# Altium PCB PCB.PcbDoc
Units mil, origin at the board's own origin, x right, y up, seen from the top; angles counter-clockwise.
Board outline 2362.2 x 2362.2 mil, 2 copper layers (Top Layer, Bottom Layer); 29 components, 22 nets, 113 pads, 20 vias.
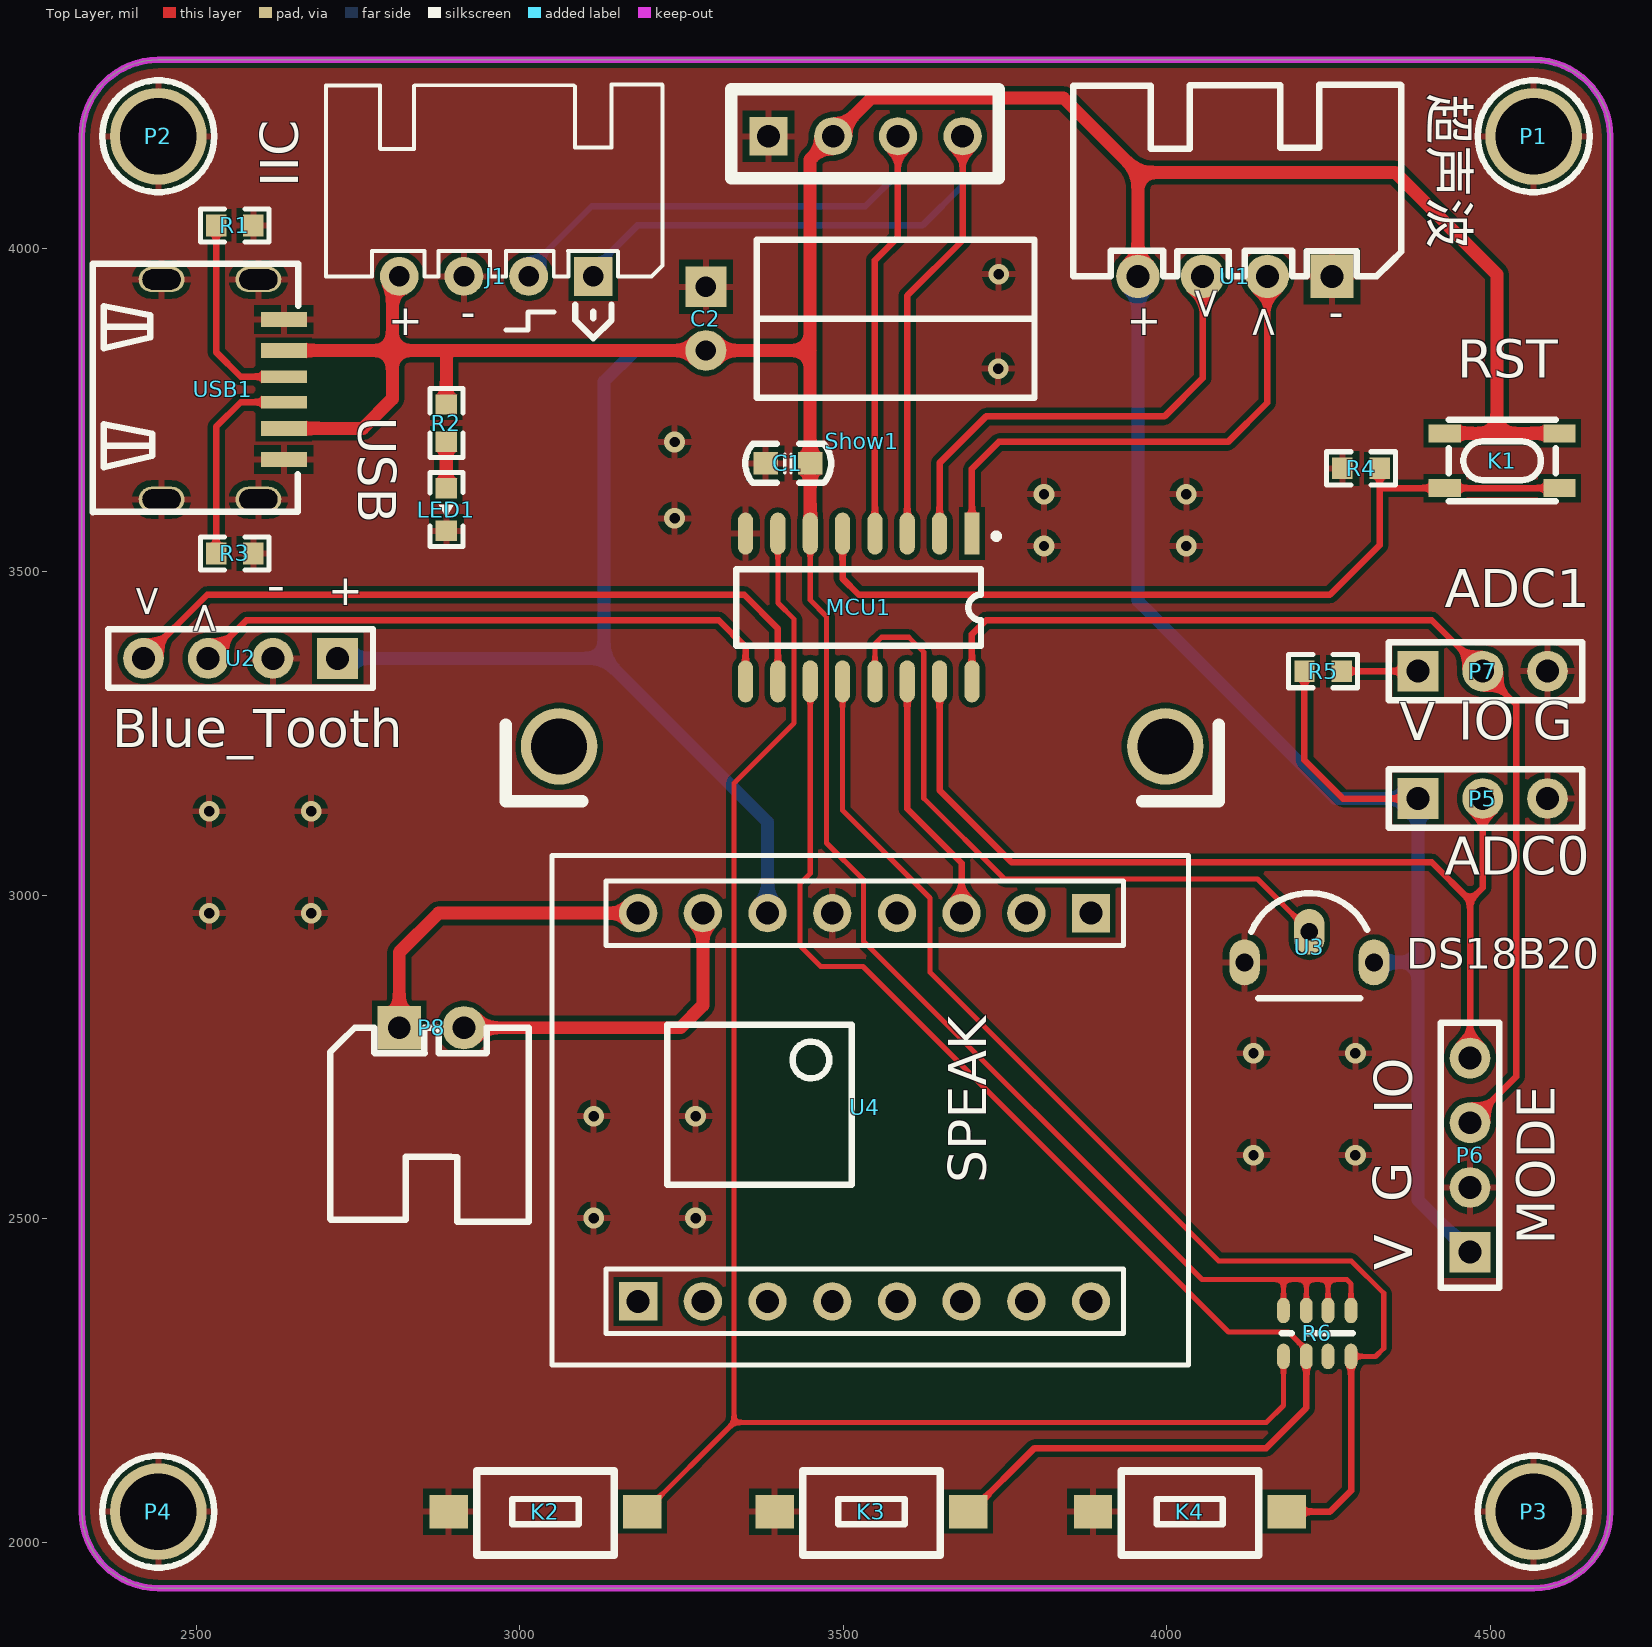
[diagram p0: Top Layer view]
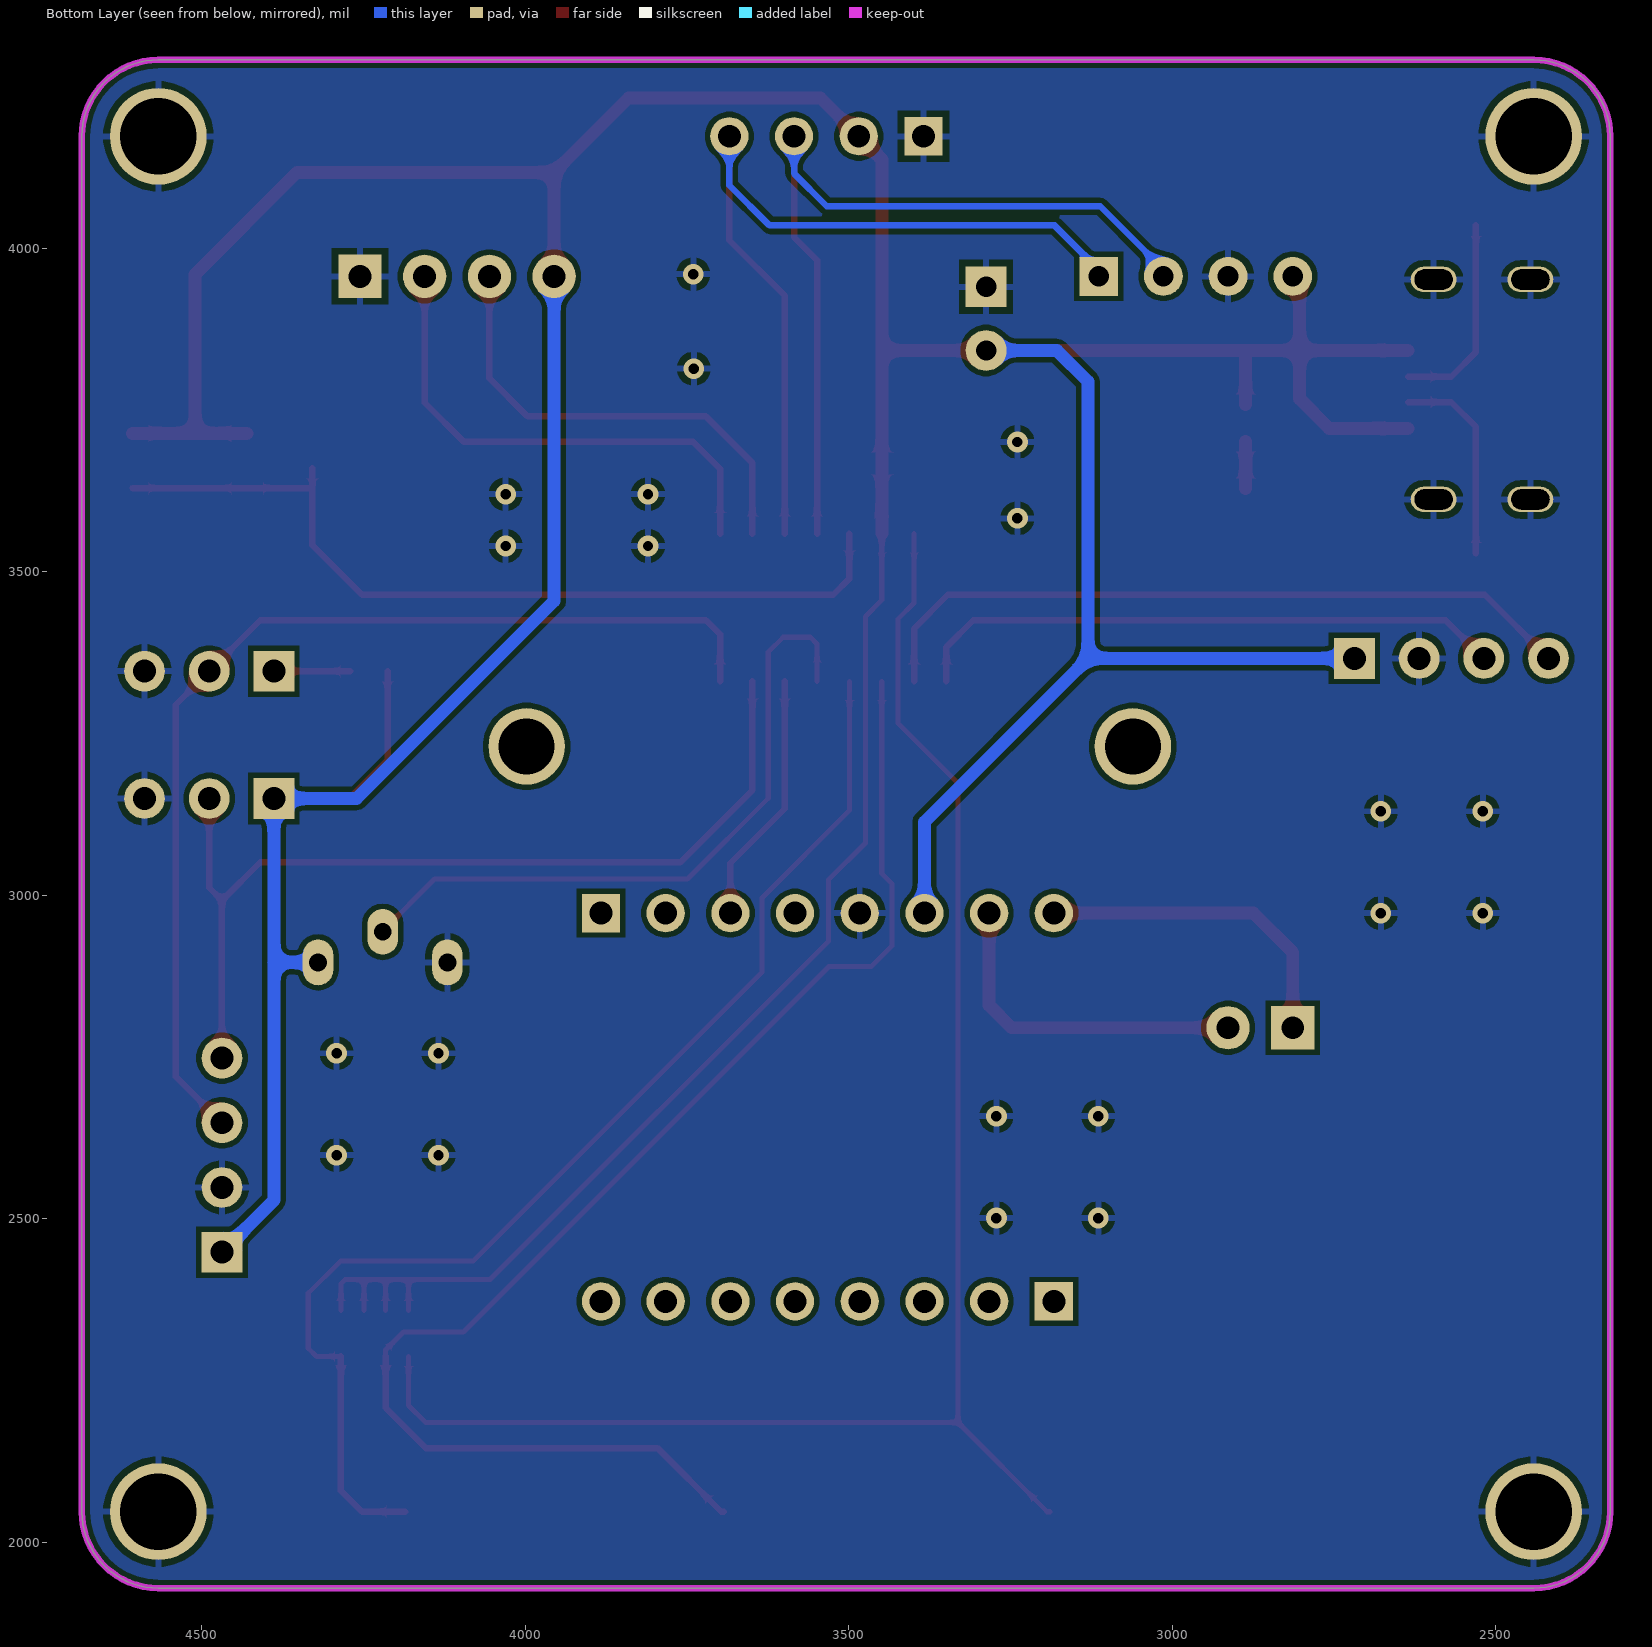
[diagram p1: Bottom Layer view, seen from below]

## Layer stack, top to bottom
Top Solder: solder mask 0.4, Solder Resist, Dk 3.5
Top Layer: signal copper 1.4
Dielectric 1: dielectric 12.6, FR-4, Dk 4.8
Bottom Layer: signal copper 1.4
Bottom Solder: solder mask 0.4, Solder Resist, Dk 3.5

## Board outline
2322.83,2047.24 2322.83,4173.23 cw(c2440.94,4173.23) 2440.94,4291.34 4566.93,4291.34 cw(c4566.93,4173.23) 4685.04,4173.23 4685.04,2047.24 cw(c4566.93,2047.24) 4566.93,1929.13 2440.94,1929.13 cw(c2440.94,2047.24)

## Design rules (kind name [scope] priority, off if disabled: settings)
Clearance [All] p1: gap=8 ignorepadtopadclearanceinfootprint=TRUE
HoleSize [All] p1: absolutevalues=TRUE maxlimit=400 minlimit=1 maxpercent=80.000 minpercent=20.000
HoleToHoleClearance [All] p1: gap=8 allowstackedmicrovias=TRUE
MinimumSolderMaskSliver [All] p1: minsoldermaskwidth=4
PolygonConnect [All] p1: connectstyle=Relief reliefconductorwidth=10 reliefentries=4 polygonreliefangle="90 Angle" airgapwidth=10
RoutingVias [All] p1: holewidth=28 width=50 viastyle="Through Hole" minholewidth=12 minwidth=24 maxholewidth=28 maxwidth=50
SilkToSilkClearance [All] p1: silktosilkclearance=0
SilkToSolderMaskClearance [IsPad] p1: minsilkscreentomaskgap=0 clearancetoexposedcopper=TRUE
SolderMaskExpansion [All] p1: expansion=4 istentingtop=FALSE
Width [All] p1: maxlimit=50 minlimit=8 preferedwidth=10
25 further rules are at their usual default settings.

## Components (designator, comment, footprint, x,y, rotation, side; value= is the part's Value field where it differs from the comment)
C1 "100NF" CAP_0603 3379.62,3667.62 r0 top
C2 "220UF" CAP_PR_2.5_6.3_RA 3287.4,3891.34 r270 top
J1 "IIC" IIC-XH2.54-4PIN 3113.39,3956.69 r180 top
K1 "KEY" KEY_SMD 4606.78,3629.41 r180 top
K2 "KEY" SW_PB_3X6 3039.37,2047.24 r180 top
K3 "KEY" SW_PB_3X6 3543.31,2047.24 r180 top
K4 "KEY" SW_PB_3X6 4035.43,2047.24 r180 top
LED1 "LED_R/G/B/Y" LED_0603_R 2886.22,3596.19 r90 top
MCU1 "STC15W408AS-16P" SOIC_16 3523.62,3444.88 r180 top
P1 "铜柱6m" M3x6_L-Type 4566.93,4173.23 r0 top
P2 "铜柱6m" M3x6_L-Type 2440.94,4173.23 r0 top
P3 "铜柱6m" M3x6_L-Type 4566.93,2047.24 r0 top
P4 "铜柱6m" M3x6_L-Type 2440.94,2047.24 r0 top
P5 "Header 3" "Header 2.54X3" 4488.19,3149.61 r0 top
P6 "Header 4" "Header F 2.54X4" 4468.5,2598.43 r90 top
P7 "Header 3" "Header 2.54X3" 4488.19,3346.46 r0 top
P8 "OUT" XH2.54-WI-2P 2863.39,2795.28 r0 top
R1 "5.1K" RESC_0603_2 2559.06,4035.43 r0 top
R2 "1K" RESC_0603_2 2886.22,3729.98 r270 top
R3 "5.1K" RESC_0603_2 2559.06,3528.35 r0 top
R4 "10K" RESC_0603_2 4300,3660 r180 top
R5 "XK" RESC_0603_2 4241.34,3346.46 r0 top
R6 "10K" RESC_0603_4 4232.28,2322.83 r0 top
Show1 "OLED_I2C" OLED_I2C 3505.67,3666.12 r270 top
U1 "HC-SR04" Ultrasonic 4255.12,3956.69 r180 top
U2 "Blue_Tooth 2.0/5.0" uart-Haerd 2718.11,3366.14 r0 top
U3 "DS18B20" TO_92B 4220,2920 r0 top
U4 "JQ8900" SpkMo 3680.68,2675.44 r270 top
USB1 "Type_c" USB-Type-c_6P 2539.37,3779.53 r270 top

## Footprints (in the part's own frame and the unit in brackets; to place one, negate y for a bottom-side part, rotate by r counter-clockwise, add the part's x,y. Pads: shape width x height; smd on the part's side, far side on the other; paste and mask are expansions set on the pad)
CAP_0603 [mil]
  rect 38x35 smd: 1(0,0) 2(69,0)
  silkscreen extent -31,-30 101,30, body extent 4,-16 67,16, height 12
CAP_PR_2.5_6.3_RA [mm] "6.3X11"
  rect 1.6x1.6 hole 0.8: 1(-1.25,0)
  round 1.6 hole 0.8: 2(1.25,0)
  silkscreen extent -3.1,2 3.1,12.9, body extent -3.18,-0.3 3.18,13.02, height 6.38
"Header 2.54X3" [mm]
  rect 1.6x1.6 hole 0.9: 1(-2.54,0)
  round 1.6 hole 0.9: 2(0,0) 3(2.54,0)
  silkscreen extent -3.68,-1.14 3.9,1.14, body extent -3.68,-1.23 3.94,1.27, height 8.3
"Header F 2.54X4" [mm]
  rect 1.6x1.6 hole 0.9: 1(-3.81,0)
  round 1.6 hole 0.9: 2(-1.27,0) 3(1.27,0) 4(3.81,0)
  silkscreen extent -5.2,-1.14 5.19,1.14, body extent -5.21,-1.25 5.21,1.25, height 8.6
IIC-XH2.54-4PIN [mil] "-XH2.54-4PIN-"
  rect 60x60 hole 32: 1(0,0)
  round 60 hole 32: 2(100,0) 3(200,0) 4(300,0)
  silkscreen extent -107,-296 413,96, body extent -105,-300 415,11, height 236
KEY_SMD [mm] "3*4*2.5MM"
  rect 1.27x0.7 smd: 1(0,0) 1(4.5,0) 2(0,-2.15) 2(4.5,-2.15)
  silkscreen extent 0.15,-2.68 4.35,0.52, body extent 0.15,-2.68 4.35,0.52, height 4
LED_0603_R [mm]
  rect 0.8x0.85 smd: 1(-0.832,0) 2(0.832,0)
  silkscreen extent -1.45,-0.65 1.45,0.65, body extent -0.81,-0.4 0.81,0.4, height 0.6
M3x6_L-Type [mm] "M3铜柱，长：6mm"
  round 3.8 hole 3: 1(0,0)
  silkscreen extent -2.2,-2.2 2.2,2.2, body extent -2.7,-2.35 2.7,2.35, height 8.55
OLED_I2C [mm]
  round 3 hole 2.2: 0(11.072,12.493) 0(11.072,-11.307)
  rect 1.5x1.5 hole 0.9: 1(-12.881,-3.084)
  round 1.5 hole 0.9: 2(-12.881,-0.544) 3(-12.881,1.996) 4(-12.881,4.536)
  silkscreen extent -14.73,-13.41 13.22,14.59, body extent -15.04,-12.62 12.82,14.08, height 13.47
RESC_0603_2 [mm]
  rect 0.8x0.85 smd: 1(-0.73,0) 2(0.73,0)
  silkscreen extent -1.35,-0.65 1.35,0.65, body extent -0.8,-0.4 0.8,0.4, height 0.38
RESC_0603_4 [mm]
  oval 0.5x1 smd: 1(-1.327,-0.9) 2(-1.327,0.9) 3(-0.425,-0.9) 4(-0.425,0.9) 5(0.425,-0.9) 6(0.425,0.9) 7(1.327,-0.9) 8(1.327,0.9)
  silkscreen extent -1.4,0 1.4,0, body extent -1.6,-0.8 1.6,0.8, height 0.5
SOIC_16 [mm]
  rect 0.6x1.65 smd: 1(-4.445,-2.9)
  oval 0.6x1.65 smd: 2(-3.175,-2.9) 3(-1.905,-2.9) 4(-0.635,-2.9) 5(0.635,-2.9) 6(1.905,-2.9) 7(3.175,-2.9) 8(4.445,-2.9) 9(4.445,2.9) 10(3.175,2.9) 11(1.905,2.9) 12(0.635,2.9) 13(-0.635,2.9) 14(-1.905,2.9) 15(-3.175,2.9) 16(-4.445,2.9)
  silkscreen extent -5.5,-2.9 4.8,1.5, body extent -5.15,-3.03 5.15,3.03, height 1.95
SpkMo [mm]
  rect 1.5x1.5 hole 0.9: 1(-7.544,5.131) 9(7.696,-12.649)
  round 1.5 hole 0.9: 2(-7.544,2.591) 3(-7.544,0.051) 4(-7.544,-2.489) 5(-7.544,-5.029) 6(-7.544,-7.569) 7(-7.544,-10.109) 8(-7.544,-12.649) 10(7.696,-10.109) 11(7.696,-7.569) 12(7.696,-5.029) 13(7.696,-2.489) 14(7.696,0.051) 15(7.696,2.591) 16(7.696,5.131)
  silkscreen extent -9.81,-16.04 10.19,8.96, body extent -9.8,-16 10.26,9.58, height 14.79
SW_PB_3X6 [mm]
  rect 1.5x1.3 smd: 1(-3.8,0) 2(3.8,0)
  silkscreen extent -2.7,-1.6 2.7,1.7, body extent -4,-1.85 4,1.85, height 2.6
TO_92B [mm]
  oval 1.2x1.8 hole 0.7: 1(-2.54,-0.6) 2(0,0.6) 3(2.54,-0.6)
  silkscreen extent -2.28,-2 2.27,2.12, body extent -2.8,-2 2.88,1.8, height 7.34
uart-Haerd [mm]
  rect 1.6x1.6 hole 0.9: 1(0,0)
  round 1.6 hole 0.9: 2(-2.54,0) 3(-5.08,0) 4(-7.62,0)
  silkscreen extent -9,-1.14 1.39,1.14, body extent -9.02,-1.25 1.4,1.25, height 8.6
Ultrasonic [mm] "-XH2.54-4PIN"
  round 1.7 hole 0.9: 1(7.62,0) 2(5.08,0) 3(2.54,0)
  rect 1.7x1.7 hole 0.9: 4(0,0)
  silkscreen extent -2.72,-7.53 10.16,0, body extent -2.5,-7.35 10.12,0.35, height 5.73
USB-Type-c_6P [mm]
  oval 1x1.8 hole 0.8 slot 1.5 at 90 deg: A(-4.38,1.43) B(4.256,1.43) C(-4.38,-2.37) D(4.256,-2.37)
  rect 0.5x1.8 smd: A5(-0.56,2.43) B5(0.44,2.43)
  rect 0.6x1.8 smd: A9(1.47,2.43) A12(2.69,2.43) B9(-1.59,2.43) B12(-2.81,2.43)
  silkscreen extent -5,-5.08 4.76,3, body extent -4.53,-4.97 4.41,1.83, height 3.22
XH2.54-WI-2P [mm] "接插件，2P"
  rect 1.7x1.7 hole 0.9: 1(-1.27,0)
  round 1.7 hole 0.9: 2(1.27,0)
  silkscreen extent -3.99,-7.62 3.81,0, body extent -3.77,-7.35 3.77,0.35, height 5.73

## Part data
C1: library part CAP, "CAP  12~50V"
C2: library part CAP_BIG, "CAP 12V ~ 50V   电解电容"
J1: "Heard"
K1 K2 K3 K4: "Key"
LED1: library part LED_SMT, "LED"
MCU1: library part STC15W-16, "MCU"
P1 P2 P3 P4: library part Pillar, "IN-OUT"
P5 P7: "Header, 3-Pin", LatestRevisionDate=17-Jul-2002, LatestRevisionNote="Re-released for DXP Platform.", Publisher="Altium Limited"
P6: "Header, 4-Pin", LatestRevisionDate=17-Jul-2002, LatestRevisionNote="Re-released for DXP Platform.", Publisher="Altium Limited"
P8: library part OUT_2PIN, "Header"
R1 R2 R3 R4 R5: library part RES, "RES 贴片"
R6: library part RES_P4, "RES"
Show1 U3: "MODE"
U1: library part Ultrasonic, "Mode"
U2: library part HC-02/06, "MODE"
U4: library part SPKMO_8900, "MODE"
USB1: library part USB-Type_c-6PIn, "USB"

## Via types
v1: diameter 32, hole 16, Top Layer to Bottom Layer, 20 vias

## Nets (pads, with @x,y where several pads share a name; then routed paths per layer and width w, separated by ;. In a path a pad name is that pad's centre, name@x,y a point inside that pad or via, vN(x,y) a via of type N, cw(c..) or ccw(c..) an arc to the next point about the centre after c; other vN are vias at no path point)
ADC0: MCU1.15 P5.2 P6.4 | length 1468.1
  Top Layer w10: MCU1.15 3648.62,3162.4 3759.84,3051.18 4409.45,3051.18 4468.5,2992.13 ; P6.4 4468.5,2992.13 ; P5.2 4488.19,3011.81 4468.5,2992.13
ADC1: MCU1.16 P6.3 P7.2 | length 1653
  Top Layer w10: MCU1.16 3698.62,3403.35 3720.47,3425.2 4409.45,3425.2 P7.2 4540,3294.65 4540,2719.92 P6.3
CC1: R1.1 USB1.A5 | length 632.5
  Top Layer w10: 2530.31,3839.69 R1.1 2530.31,3839.69 ; 2530.31,3839.69 2568.43,3801.57 ; 2530.31,3839.69 2568.43,3801.57 ; 2568.43,3801.57 USB1.A5 2568.43,3801.57
CC2: R3.1 USB1.B5 | length 316.3
  Top Layer w10: R3.1 2530.31,3724.09 2568.43,3762.2 USB1.B5
DQ: MCU1.13 U3.2 | length 1055.3
  Top Layer w8: MCU1.13 3548.62,3388.62 3559,3399 3601,3399 3624,3376 3624,3150 3749,3025 4139.81,3025 4220,2944.81 U3.2
Echo: MCU1.1 U1.3 | length 794.3
  Top Layer w10: MCU1.1 3698.62,3659.25 3740.16,3700.79 4094.49,3700.79 4155.12,3761.42 U1.3
GND: C1.1 C2.1 J1.3 K2.2 K3.2 K4.2 LED1.1 MCU1.8 P1.1 P2.1 P3.1 P4.1 P5.3 P6.2 P7.3 R1.2 R3.2 R4.2 Show1.1 U1.4 U2.2 U3.1 U4.5 USB1.A USB1.A12 USB1.B USB1.B12 USB1.C USB1.D
  other v1: 3113.96,2501.12 3271.44,2501.12 4133.86,2598.43 4291.34,2598.43 3113.96,2658.6 3271.44,2658.6 4133.86,2755.91 4291.34,2755.91 2519.68,2972.44 2677.17,2972.44 2519.68,3129.92 2677.17,3129.92 3810,3540 4030,3540 3238.98,3582.68 3810,3620 4030,3620 3238.98,3700.79 3739.2,3814.06 3740,3960
KEY1: K4.1 MCU1.12 R6.7 | length 1873.5
  Top Layer w8: MCU1.12 3498.62,3131.38 3634,2996 3634,2881 4080,2435 4285,2435 4335,2385 4335,2300 4322.4,2287.4 R6.7
  Top Layer w10: K4.1 4251.97,2047.24 4284.53,2079.8 R6.7
KEY2: K3.1 MCU1.11 R6.3 | length 2135.1
  Top Layer w8: MCU1.11 3448.62,3033.62 3433,3018 3433,2922 3465,2890 3530,2890 4095,2325 4187.78,2325 4215.54,2297.24 R6.3
  Top Layer w10: K3.1 3696.85,2047.24 3795.28,2145.67 4153.54,2145.67 4215.54,2207.66 R6.3
KEY3: K2.1 MCU1.7 R6.1 | length 2558
  Top Layer w8: K2.1 3192.91,2047.24 3330.71,2185.04 ; MCU1.7 3398.62,3451.77 3423.81,3426.58 3423.81,3266.33 3330.71,3173.23 3330.71,2185.04 ; R6.1 4180.04,2211.54 4153.54,2185.04 3330.71,2185.04
NetLED1_2: LED1.2 R2.2 | length 72.3
  Top Layer w20: LED1.2 R2.2
NetP7_1: P7.1 R5.2 | length 118.1
  Top Layer w10: R5.2 P7.1
RST: K1.1 MCU1.5 R4.1 | length 1338.7
  Top Layer w10: MCU1.5 3498.62,3489.57 3523.62,3464.57 4251.97,3464.57 4328.74,3541.34 4328.74,3630 ; R4.1 4328.74,3630 ; K1.1@4606.77,3629.41 4429.61,3629.41 4329.33,3629.41 4328.74,3630
RXD: MCU1.9 U2.3 | length 925.1
  Top Layer w10: U2.3 2577.17,3425.2 3307.09,3425.2 3348.62,3383.66 MCU1.9
SCL: J1.2 MCU1.4 Show1.3 | length 1333.8
  Top Layer w10: MCU1.4 3548.62,3981.69 3584.25,4017.32 Show1.3
  Bottom Layer w10: J1.2@3002.76,3956.69 3111.06,4065 3533.5,4065 3584.25,4115.75 Show1.3
SDA: J1.1 MCU1.3 Show1.4 | length 1365.1
  Top Layer w10: MCU1.3 3598.62,3926.97 3684.25,4012.6 Show1.4
  Bottom Layer w10: J1.1@3102.76,3956.69 3181.5,4035.43 3622.05,4035.43 3684.25,4097.64 Show1.4
SPK+: P8.1 U4.8 | length 510.9
  Top Layer w20: P8.1 2813.39,2911.81 2874.02,2972.44 U4.8
SPK-: P8.2 U4.7 | length 526.2
  Top Layer w20: P8.2 3248.03,2795.28 3282.68,2829.92 U4.7
Trig: MCU1.2 U1.2 | length 727.5
  Top Layer w10: MCU1.2 3648.62,3668.31 3720.47,3740.16 3996.06,3740.16 4055.12,3799.21 U1.2
TXD: MCU1.10 U2.4 | length 1124.6
  Top Layer w10: U2.4 2516.54,3464.57 3346.46,3464.57 3398.62,3412.4 MCU1.10
TXD_2: MCU1.14 U4.3 | length 393.1
  Top Layer w10: MCU1.14 3598.62,3133.66 3682.68,3049.61 U4.3
VCC: C1.2 C2.2 J1.4 K1.2 MCU1.6 P5.1 P6.1 R2.1 R5.1 R6.2 R6.4 R6.6 R6.8 Show1.2 U1.1 U2.1 U3.3 U4.6 USB1.A9 USB1.B9 | length 9190.5
  Top Layer w8: MCU1.6 3448.62,3456.38 3474,3431 3474,3081 3531,3024 3531,2929 4054,2406 4180.04,2406 ; R6.2 4180.04,2406 ; R6.4 4215.54,2406 ; R6.6 4249.03,2406 ; R6.8 4284.53,2399.47 4278,2406 4249.03,2406 ; 4180.04,2406 4215.54,2406 ; 4215.54,2406 4249.03,2406
  Top Layer w10: R5.1 4212.6,3208.66 4271.65,3149.61 P5.1
  Top Layer w20: USB1.A9 2757.09,3721.65 2802.76,3767.32 2802.76,3842.13 ; USB1.B9 2802.76,3842.13 ; J1.4@2802.76,3956.69 2802.76,3842.13 ; R2.1 2886.22,3834.65 2893.7,3842.13 ; MCU1.6 C1.2 3448.62,3842.13 ; U1.1 3955.12,4117.32 ; K1.2@4429.61,3714.06 4510,3714.06 ; K1.2@4606.77,3714.06 4510,3714.06 ; 2802.76,3842.13 2893.7,3842.13 ; 2893.7,3842.13 C2.2 3448.62,3842.13 ; 3448.62,3842.13 3448.62,4137.6 Show1.2 3543.31,4232.28 3840.16,4232.28 3955.12,4117.32 ; 3955.12,4117.32 4352.68,4117.32 4510,3960 4510,3714.06
  Bottom Layer w20: U2.1 3130,3366.14 ; C2.2 3178.08,3842.13 3130,3794.05 3130,3366.14 ; U4.6 3382.68,3113.46 3130,3366.14 ; U1.1 3955.12,3454.88 4260.39,3149.61 P5.1 4388.19,2896.38 ; U3.3 4388.19,2896.38 ; P6.1 4388.19,2528.74 4388.19,2896.38
pads on no net: R6.5 Show1.0 U4.1 U4.2 U4.4 U4.9 U4.10 U4.11 U4.12 U4.13 U4.14 U4.15 U4.16

## Polygon pours and split planes (outlines as drawn)
GND on Top Layer "GND_L01_P000" (solid, remove dead copper, pour order 0): 1870.08,4625.98 5314.96,4625.98 5314.96,1476.38 1870.08,1476.38
GND on Bottom Layer "GND_L02_P001" (solid, remove dead copper, pour order 1): 2066.93,4625.98 5314.96,4625.98 5314.96,1377.95 2066.93,1377.95

## Keep-outs
Keep-Out Layer:
  lines w10: 2440.94,4291.34 ccw(c2440.94,4173.23) 2322.83,4173.23 2322.83,2047.24 ccw(c2440.94,2047.24) 2440.94,1929.13 4566.93,1929.13 ccw(c4566.93,2047.24) 4685.04,2047.24 4685.04,4173.23 ; 2440.94,4291.34 4566.93,4291.34 ; 2440.94,4291.34 4566.93,4291.34 ; 4566.93,4291.34 cw(c4566.93,4173.23) 4685.04,4173.23 ; 4566.93,4291.34 cw(c4566.93,4173.23) 4685.04,4173.23

## Silkscreen, mask and mechanical layers (free items; w line width, h text height)
Top Overlay:
  text "超声波" at 4390.27,4240 h100 r270
  text "IIC" at 2676.24,4094.49 h100 r90
  text "RST" at 4448.82,3780.45 h100
  text "USB" at 2730.93,3740 h100 r270
  text "ADC1" at 4429.23,3426.12 h100
  text "IO" at 4450,3220.93 h100
  text "G" at 4565.09,3220.93 h100
  text "V" at 4360,3220 h100
  text "Blue_Tooth" at 2370,3209.8 h100
  text "ADC0" at 4429.23,3012.74 h100
  text "DS18B20" at 4370,2870.74 h80
  text "IO" at 4398.68,2661.81 h100 r90
  text "G" at 4397.19,2525.33 h100 r90
  text "MODE" at 4619.07,2460 h100 r90
  text "V" at 4398.11,2420.24 h100 r90

## Text inside footprints (layer, text, board x,y; h text height)
J1: Top Overlay "+" at 2796.39,3922.46 h80 r180; Top Overlay "-" at 2931.39,3864.46 h80
U1: Top Overlay "<" at 4185.01,3912.69 h80 r90; Top Overlay "<" at 4025.23,3887.69 h80 r270; Top Overlay "+" at 3938.12,3922.46 h80 r180; Top Overlay "-" at 4273.12,3864.46 h80
U2: Top Overlay "-" at 2608.68,3433.47 h100; Top Overlay "+" at 2703.66,3432.89 h80; Top Overlay "<" at 2388.7,3427.14 h80 r270; Top Overlay "<" at 2548.48,3455.14 h80 r90
U4: Top Overlay "SPEAK" at 3739.75,2555.27 h100 r90